# EAGLE board pa1a-proto-iso-rs485-v1 (EAGLE 7.7.0)
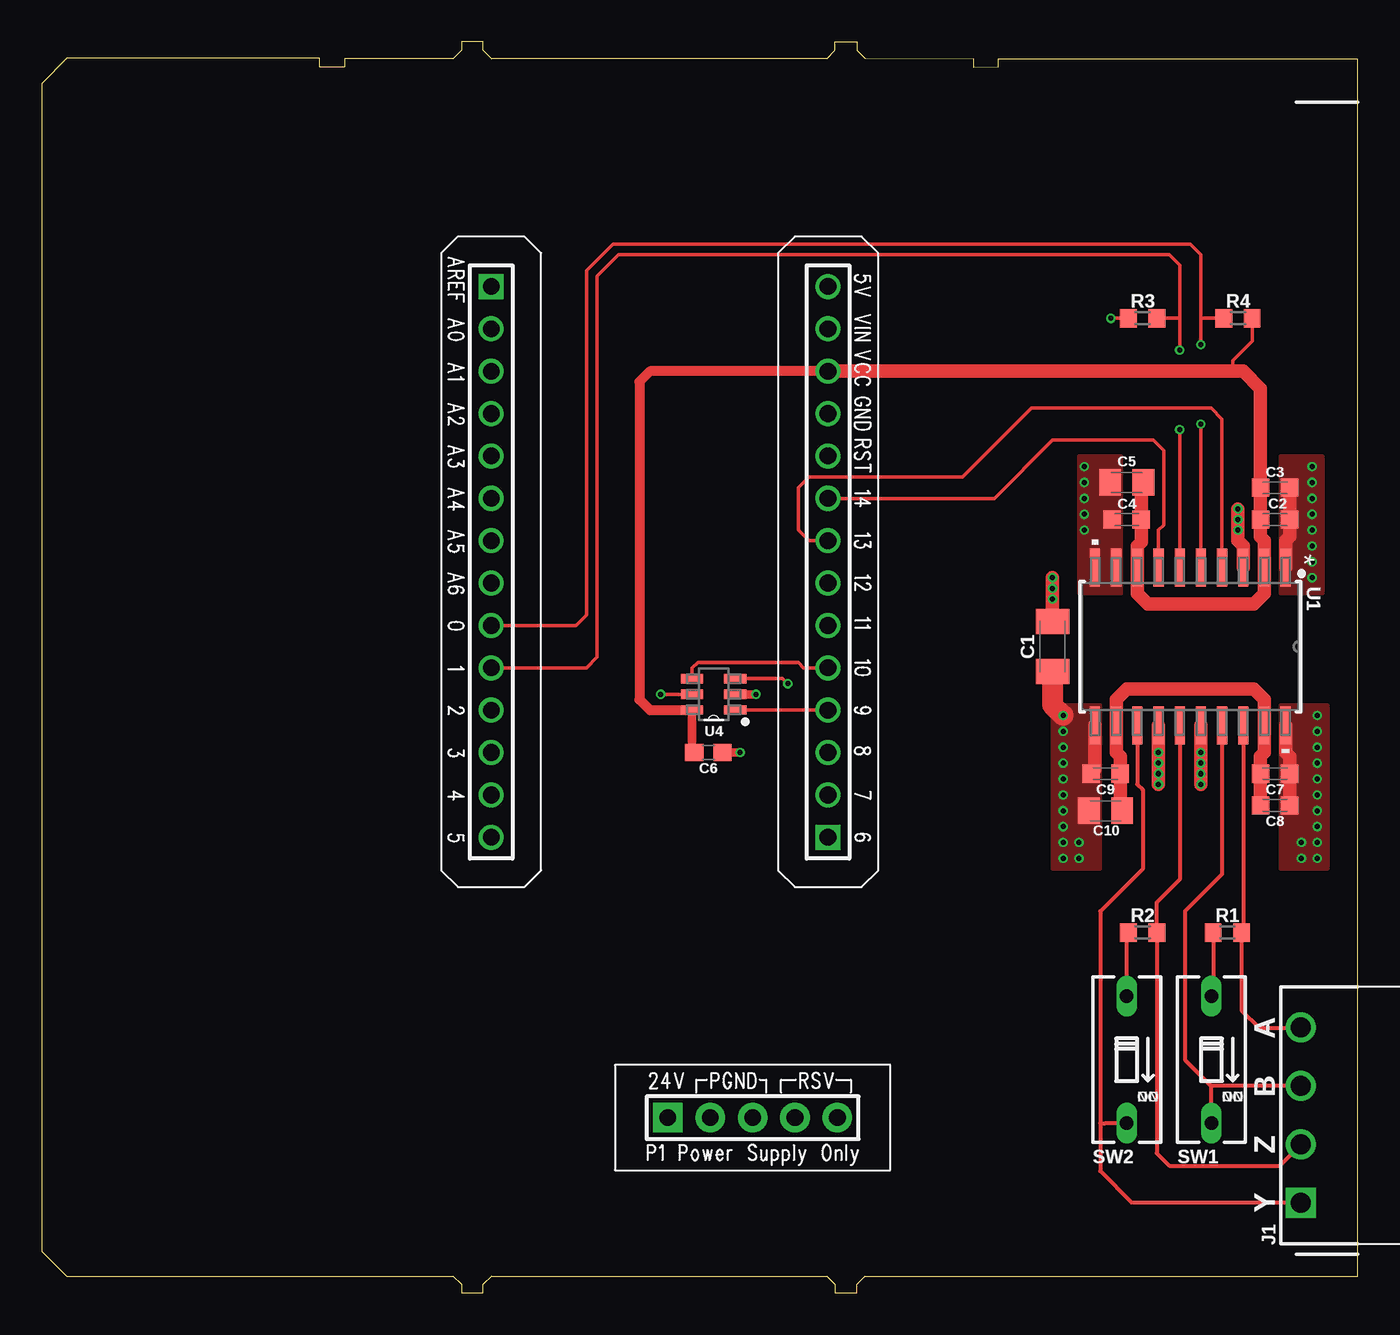
[diagram p0: board, top side]
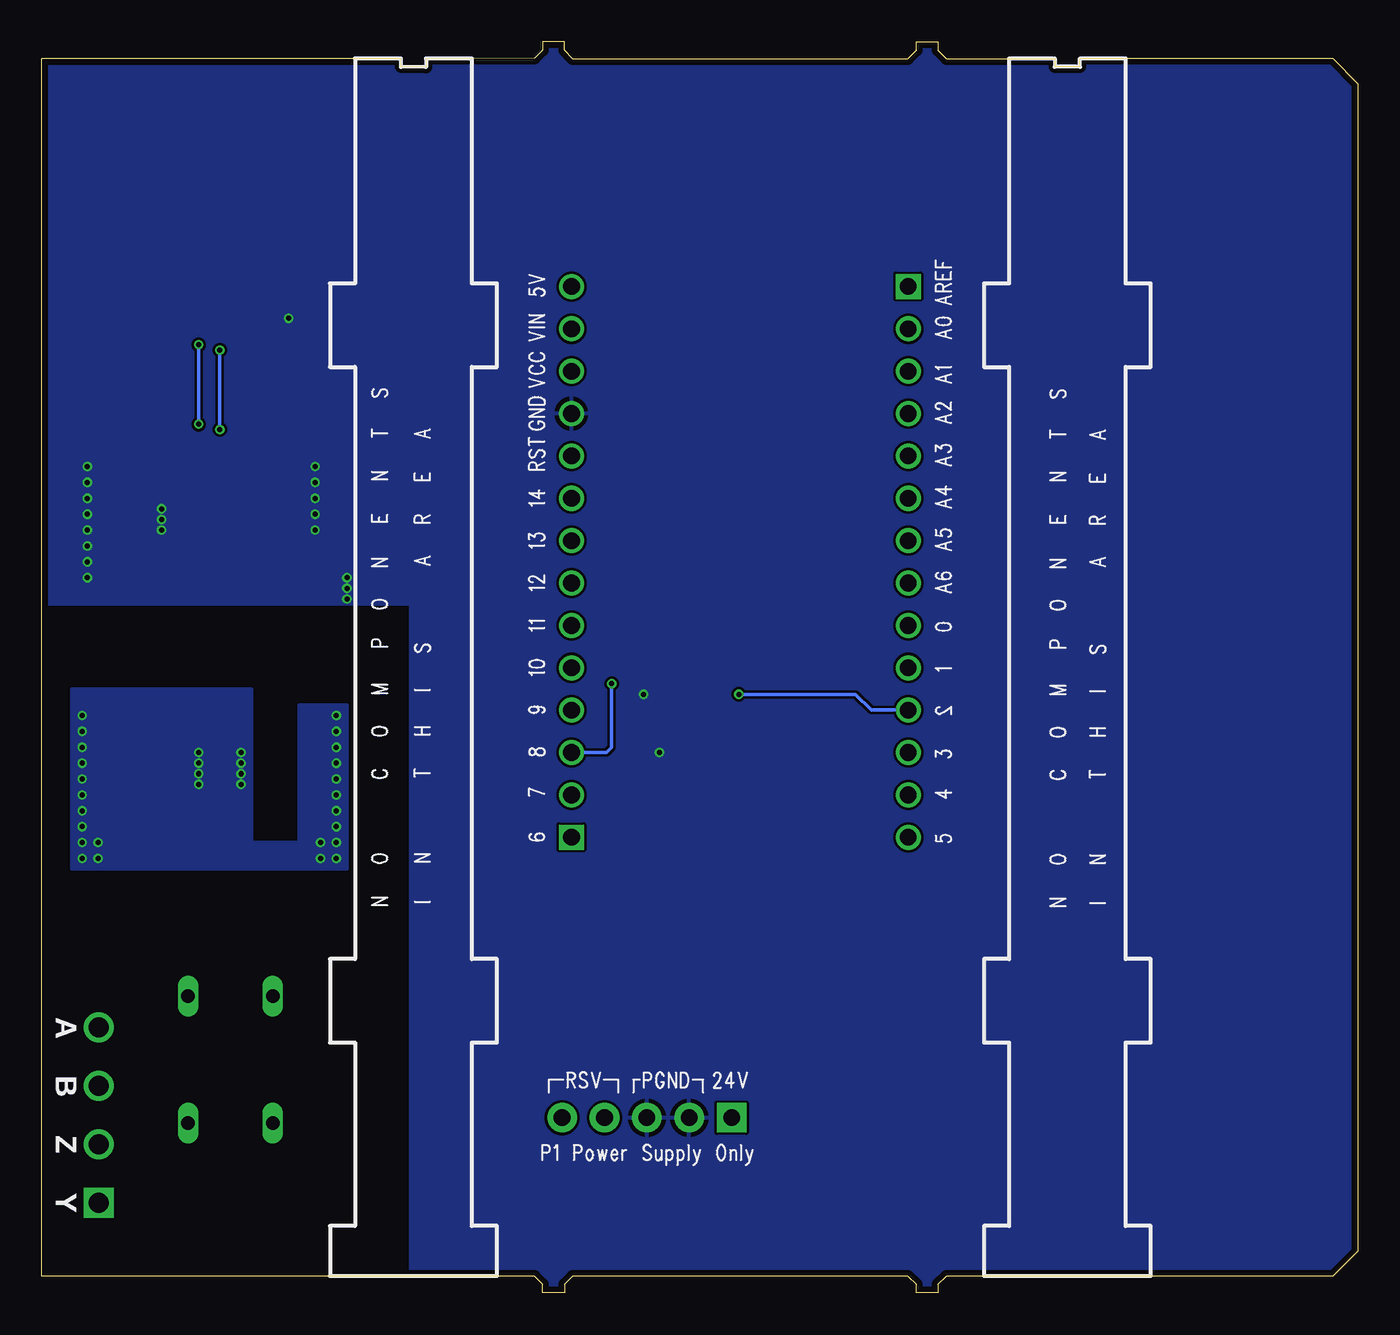
[diagram p1: board, bottom side, seen from below]

Size 78.9 x 75.01 mm. Coordinates in mm from the lower left corner, seen from the top.
Copper layers (1*16): Top 0.035559375mm / dielectric 1.6mm / Bottom 0.035559375mm
Design rules "oshpark-2layer-2018": minimum track width 6mil, minimum drill 10mil, track to track 6mil, track to pad 6mil, pad to pad 6mil, via to via 6mil, smd to smd 6mil, copper to edge 15mil, drill to drill 6mil, minimum pad ring 5mil, minimum via ring 5mil, stop-mask expansion 2.5mil, vias tented up to drill 0mil, thermal gap 10mil

## Footprints (pad centres in the part's own frame; a part is rotated, then mirrored left to right if it is on the bottom)
C1206K = smd 1.5 x 2: 1 -1.5,0; 2 1.5,0
C0603K = smd 1.05 x 1.08: 1 -0.875,0; 2 0.875,0
C0805K = smd 1.3 x 1.6: 1 -1,0; 2 1,0
C0603 = smd 1.1 x 1: 1 -0.85,0; 2 0.85,0
PHOENIX-XXXXXXX-TERM-BLOCK-HDR-4POS-90DEG-3.5MM = drill 1.2 square: 1 0,0 | drill 1.2: 2 3.5,0; 3 7,0; 4 10.5,0
R0603 = smd 1 x 1.1: 1 -0.85,0; 2 0.85,0
DIP-01-PTH = drill 0.813 long: 1 -3.81,0; 2 3.81,0
RW_20-M = smd 2.286 x 0.61: 1 -4.737,5.715; 2 -4.737,4.445; 3 -4.737,3.175; 4 -4.737,1.905; 5 -4.737,0.635; 6 -4.737,-0.635; 7 -4.737,-1.905; 8 -4.737,-3.175; 9 -4.737,-4.445; 10 -4.737,-5.715; 11 4.737,-5.715; 12 4.737,-4.445; 13 4.737,-3.175; 14 4.737,-1.905; 15 4.737,-0.635; 16 4.737,0.635; 17 4.737,1.905; 18 4.737,3.175; 19 4.737,4.445; 20 4.737,5.715
SOT95P270X145-6N = smd 1.321 x 0.559: 1 -1.295,0.94; 2 -1.295,0; 3 -1.295,-0.94; 4 1.295,-0.94; 5 1.295,0; 6 1.295,0.94
P1AM-PROTO-BLANK = drill 1: 0 26.67,38.735; 1 26.67,36.195; 2 26.67,33.655; 3 26.67,31.115; 4 26.67,28.575; 5 26.67,26.035; 5V 46.863,59.055; 7 46.863,28.575; 8 46.863,31.115; 9 46.863,33.655; 10 46.863,36.195; 11 46.863,38.735; 12 46.863,41.275; 13 46.863,43.815; 14 46.863,46.355; A0 26.67,56.515; A1 26.67,53.975; A2 26.67,51.435; A3 26.67,48.895; A4 26.67,46.355; A5 26.67,43.815; A6 26.67,41.275; GND@1 46.863,51.435; RST 46.863,48.895; VCC 46.863,53.975; VIN 46.863,56.515 | drill 1 square: 6 46.863,26.035; AREF 26.67,59.055 | drill 1 pad 1.778 square: 24V 37.262,9.22 | drill 1 pad 1.778: GND@2 39.802,9.22; GND@3 42.342,9.22; RSV1 44.882,9.22; RSV2 47.422,9.22

## Placement (x,y rotation side)
C1  1000pF 2KV 1206  [C1206K]  60.6,38.74 270 top
C2  0.01uF 0603  [C0603K]  73.94,46.36 0 top
C3  0.1uF 0603  [C0603K]  73.94,48.27 0 top
C4  0.1uF 0603  [C0603K]  65.05,46.36 180 top
C5  10uF 0805  [C0805K]  65.05,48.59 180 top
C6  0.1uF  [C0603]  39.97,32.39 0 top
C7  0.01uF 0603  [C0603K]  73.94,31.12 0 top
C8  0.1uF 0603  [C0603K]  73.94,29.22 0 top
C9  0.1uF 0603  [C0603K]  63.78,31.12 180 top
C10  10uF 0805  [C0805K]  63.78,28.9 180 top
J1  PHOENIX-XXXXXXX-TERM-BLOCK-HDR-4POS-90DEG-3.5MM  [PHOENIX-XXXXXXX-TERM-BLOCK-HDR-4POS-90DEG-3.5MM]  75.49,5.41 90 top
R1  120 0603  [R0603]  71.08,21.6 180 top
R2  120 0603  [R0603]  66,21.6 180 top
R3  100k 0603  [R0603]  66,58.43 0 top
R4  100k 0603  [R0603]  71.72,58.43 180 top
SW1  418117270901  [DIP-01-PTH]  70.13,13.98 270 top
SW2  418117270901  [DIP-01-PTH]  65.05,13.98 270 top
U1  ADM2582EBRWZ-REEL7RW_20-M  [RW_20-M]  68.86,38.74 270 top
U4  25AA02E48T-I/OT  [SOT95P270X145-6N]  40.28,35.89 180 top
X1  P1AM-PROTO-BLANK  [P1AM-PROTO-BLANK]  0.28,1.28 0 top

## Library data of the parts
C1-C10 R1-R4 = rcl
J1 = phoenix-term-block-hdr
SW1 SW2 = dip-switch-wurth- 418117270901
U1 = ADM2582EBRWZ-REEL7; BUILT_BY: EMA_UL_Team; COPYRIGHT: Copyright (C) 2018 Accelerated Designs. All rights reserved; MANUFACTURER_PART_NUMBER: ADM2582EBRWZ-REEL7; VENDOR: Analog Devices Inc
U4 = 25AA02E48T-I_OT; DESCRIPTION: 25AA02E48 Series 2 Kbit _256 x 8_ 5.5 V SMT SPI Bus Serial EEPROM - SOT-23-6; DIGI-KEY_PART_NUMBER: 25AA02E48T-I/OTCT-ND; DIGI-KEY_PURCHASE_URL: https://www.digikey.com/product-detail/en/microchip-technology/25AA02E48T-I-OT/25AA02E48T-I-OTCT-ND/2060055?utm_source=snapeda&utm_medium=aggregator&utm_campaign=symbol; MF: Microchip; MP: 25AA02E48T-I/OT; PACKAGE: SOT-23-6 Microchip
X1 = P1AM-PROTO-BLANK

## Nets
+3V3: C2.1 C3.1 C4.1 C5.1 C6.1 R4.1 U1.2 U1.8 U4.6 X1.VCC
+5V: X1.5V
/RE: R4.2 U1.5 X1.0
A: J1.4 R1.1 U1.18
B: J1.3 SW1.2 U1.17
CS_E48: U4.5 X1.2
DE: R3.2 U1.6 X1.1
GND: C1.1 C2.2 C3.2 C4.2 C5.2 C6.2 R3.1 U1.1 U1.3 U1.9 U1.10 U4.2 X1.GND@1 X1.GND@2 X1.GND@3
ISOGND: C1.2 C7.2 C8.2 C9.2 C10.2 U1.11 U1.14 U1.16 U1.20
ISOVCC: C7.1 C8.1 C9.1 C10.1 U1.12 U1.19
MISO: U4.4 X1.10
MOSI: U4.3 X1.8
N$7: R1.2 SW1.1
N$8: R2.2 SW2.1
RXD: U1.4 X1.13
SCK: U4.1 X1.9
TXD: U1.7 X1.14
Y: J1.1 SW2.2 U1.13
Z: J1.2 R2.1 U1.15

## Tracks (layer width: path | path; a pad name or v marks a point on that pad's centre or on a via)
+3V3
  Top 0.203: R4.1 72.57,57.06 71.4,55.89 71.4,55.25
  Top 0.406: 38.99,32.52 C6.1
  Top 0.508: U4.6 38.99,32.52
  Top 0.61: X1.VCC 36.47,55.25 35.84,54.62 35.84,35.57 36.47,34.93 38.98,34.93 U4.6
  Top 0.813: C5.1 65.92,48.46 C4.1 65.92,45.01 65.68,44.78 U1.8 65.68,41.92 66.32,41.28 72.67,41.28 73.3,41.92 U1.2 73.3,45.09 73.06,45.33 C2.1 C3.1 73.06,54.22 72.03,55.25 71.4,55.25 X1.VCC
/RE  (via drill 0.3)
  Top 0.203: X1.0 32.03,40.01 32.66,40.65 32.66,61.29 34.25,62.87 68.86,62.87 69.49,62.24 69.49,58.43 | 69.49,58.43 v69.49,56.84 | v69.49,52.08 U1.5 | R4.2 69.49,58.43
  Bottom 0.203: v69.49,56.84 v69.49,52.08
A
  Top 0.254: J1.4 75.47,15.88 72.99,15.88 71.93,16.94 R1.1 72.03,21.7 U1.18
B
  Top 0.254: 70.13,12.39 68.54,13.98 68.54,22.87 70.76,25.09 U1.17 | SW1.2 70.13,12.39 | J1.3 70.14,12.4 70.13,12.39
CS_E48  (via drill 0.3)
  Top 0.203: U4.5 v37.11,35.89
  Bottom 0.203: v37.11,35.89 30.12,35.89 29.17,34.93 X1.2
DE  (via drill 0.3)
  Top 0.203: X1.1 32.66,37.47 33.3,38.11 33.3,60.97 34.57,62.24 67.59,62.24 68.22,61.6 68.22,58.43 | 68.22,58.43 v68.22,56.52 | v68.22,51.76 U1.6 | R3.2 68.22,58.43
  Bottom 0.203: v68.22,56.52 v68.22,51.76
GND  (via drill 0.3)
  Top 0.203: R3.1 v64.1,58.43
  Top 0.406: 64.1,48.63 C5.2
  Top 0.508: U4.2 v42.82,35.89 | C6.2 v41.87,32.39
  Top 0.813: C1.1 v60.6,41.6 v60.6,42.24 v60.6,42.87 | 64.1,46.29 C4.2 | 64.17,48.46 C5.2 | U1.1 74.57,45.09 74.81,45.33 C2.2 C3.2 | U1.3 72.03,44.78 71.72,45.09 v71.72,45.73 v71.72,46.36 v71.72,47
  other vias: 62.51,49.54 62.51,48.59 62.51,47.63 62.51,46.68 62.51,45.73 76.16,49.54 76.16,48.59 76.16,47.63 76.16,46.68 76.16,45.73 76.16,44.78 76.16,43.82 76.16,42.87
  pour Bottom (isolate 0.152): -0.36,-0.31 56.79,-0.31 56.79,41.28 79.02,41.28 79.02,75.26 -0.36,75.26
  pour Top (isolate 0.152, no thermals): 76.8,50.17 76.8,41.92 74.26,41.92 74.26,50.17
  pour Top (isolate 0.152, no thermals): 64.73,50.17 64.73,41.92 62.19,41.92 62.19,50.17
ISOGND  (via drill 0.3)
  Top 0.813: U1.11 63.14,31.36 C9.2 | 62.9,29.02 C10.2 | U1.20 74.57,32.39 74.81,32.15 C7.2 C8.2 | U1.16 v69.49,32.39 v69.49,31.76 v69.49,31.12 v69.49,30.49 | U1.14 v66.95,31.76 v66.95,31.12 v66.95,30.49
  Top 1.27: C1.2 60.6,35.25 v61.24,34.61
  other vias: 61.24,30.81 61.24,29.85 61.24,28.9 61.24,27.95 61.24,27 61.24,26.04 62.19,26.04 76.48,30.81 76.48,29.85 76.48,28.9 76.48,27.95 76.48,27 76.48,26.04 75.53,26.04 75.53,27 76.48,31.76 76.48,32.71 76.48,33.66 76.48,34.62 66.95,32.39 61.24,31.76 61.24,32.71 61.24,33.66 62.19,27
  pour Bottom (isolate 0.152): 66.32,36.2 77.11,36.2 77.11,25.41 60.6,25.41 60.6,35.25 63.46,35.25 63.46,27 66.32,27
  pour Top (isolate 0.152, no thermals): 63.46,35.25 63.46,25.41 60.6,25.41 60.6,35.25
  pour Top (isolate 0.152, no thermals): 77.11,35.25 77.11,25.41 74.26,25.41 74.26,35.25
ISOVCC
  Top 0.813: C10.1 64.65,29.02 C9.1 64.65,32.15 64.41,32.39 U1.12 64.41,35.57 65.05,36.2 72.67,36.2 73.3,35.57 U1.19 73.3,32.39 73.06,32.15 C7.1 C8.1
MISO
  Top 0.203: U4.4 38.99,37.45 39.33,37.79 45.36,37.79 45.68,37.47 X1.10
MOSI  (via drill 0.3)
  Top 0.203: U4.3 44.42,36.82 v44.73,36.52
  Bottom 0.203: v44.73,36.52 44.73,32.71 45.05,32.39 X1.8
N$7
  Top 0.254: R1.2 70.23,17.89 SW1.1
N$8
  Top 0.254: SW2.1 65.05,21.5 R2.2
RXD
  Top 0.203: X1.13 46,45.09 45.36,45.73 45.36,48.27 46,48.9 55.21,48.9 59.33,53.03 70.13,53.03 70.76,52.39 U1.4
SCK
  Top 0.152: X1.9
  Top 0.203: U4.1 X1.9
TXD
  Top 0.203: X1.14 57.11,47.63 60.6,51.12 66.64,51.12 67.27,50.49 67.27,46.04 66.95,45.73 U1.7
Y
  Top 0.254: U1.13 65.68,30.49 66,30.17 66,25.41 63.46,22.87 63.46,10.17 | 63.46,10.17 63.46,7.31 65.37,5.41 J1.1 | SW2.2 63.78,10.17 63.46,10.17
Z
  Top 0.254: J1.2 74.21,7.63 67.59,7.63 66.85,8.37 R2.1 66.85,23.4 68.22,24.77 U1.15

## Text on the board
tNames: A | B | Z | Y
bNames: A | B | Z | Y
_tsilk: R3 | R4 | C5 | C3 | C4 | C2 | U1 | C1 | U4 | C6 | C9 | C7 | C10 | C8 | R2 | R1 | A | ON | ON | B | Z | SW2 | SW1 | Y | J1
_bsilk: A | B | Z | Y